# Altium PCB PCB_热插拔CSPS电源背板_ESP32.pcbdoc
Units mm, origin at the board's own origin, x right, y up, seen from the top; angles counter-clockwise.
Board outline 100.15 x 40.25 mm, 2 copper layers (Top Layer, Bottom Layer); 31 components, 27 nets, 191 pads, 313 vias.
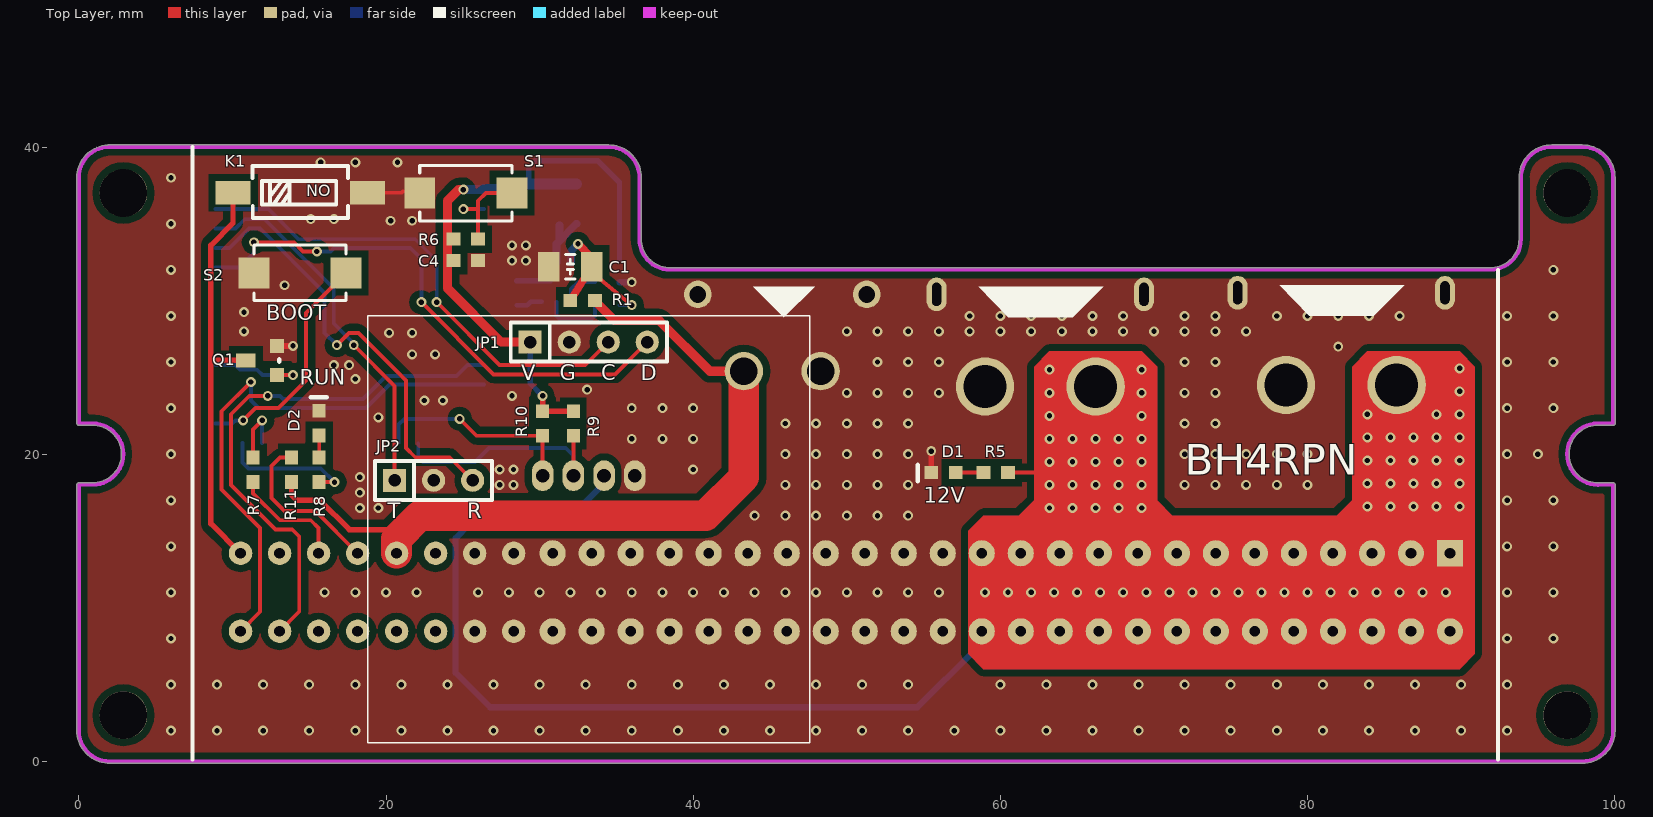
[diagram p0: Top Layer view]
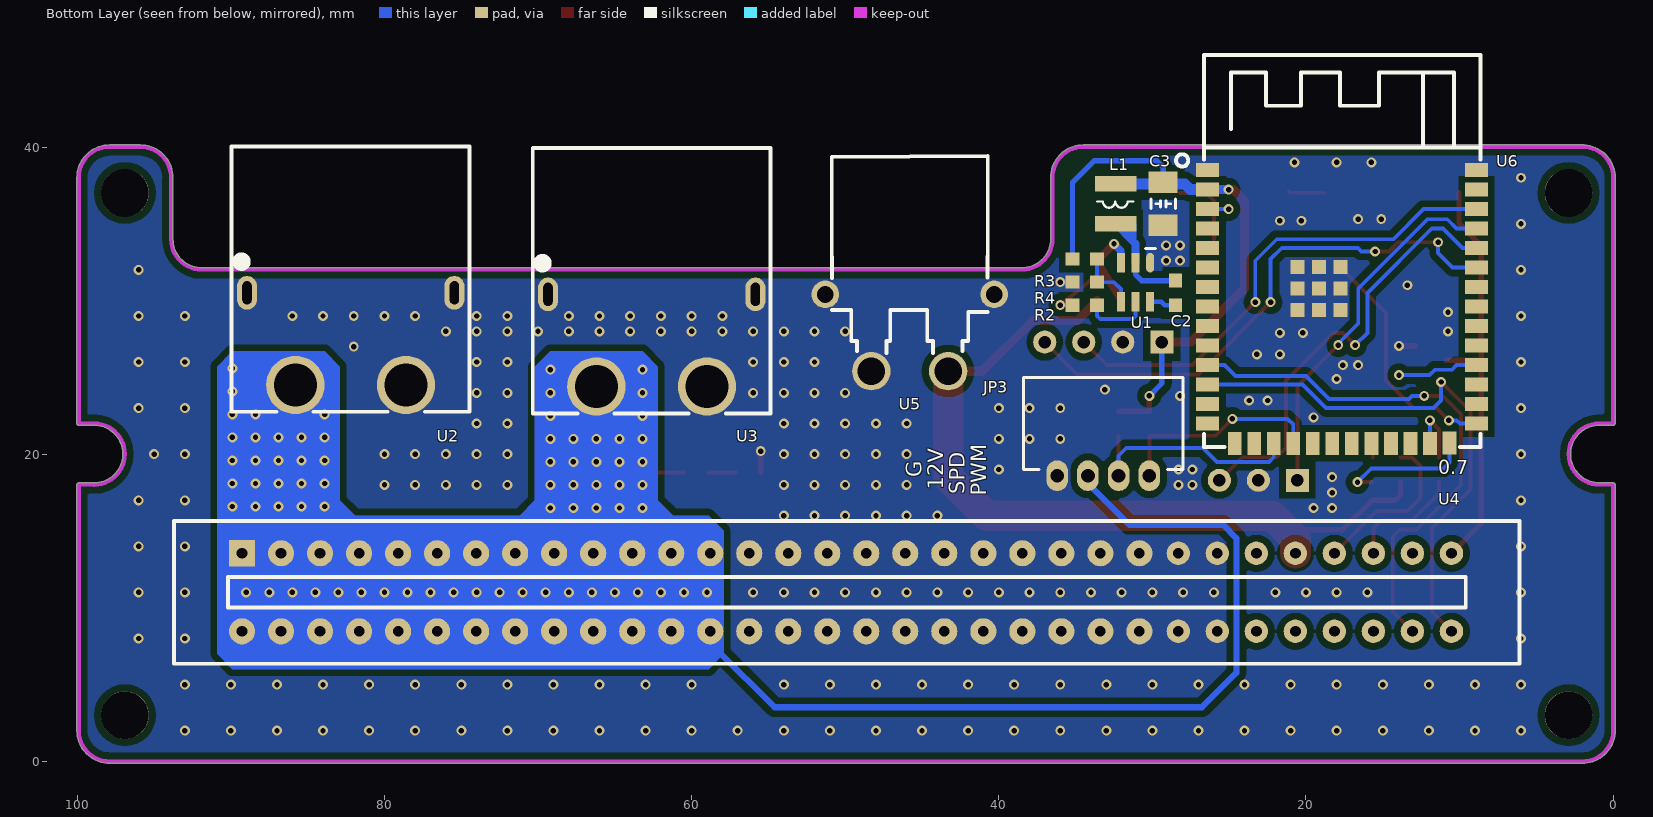
[diagram p1: Bottom Layer view, seen from below]
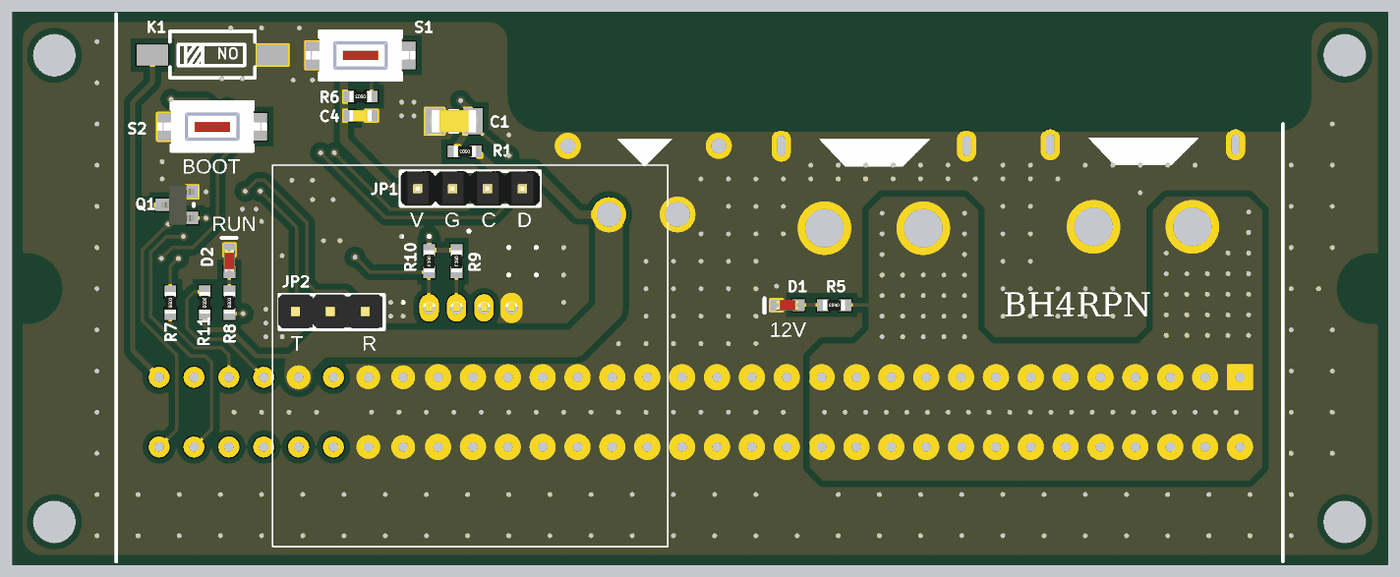
[diagram p2: 3D render of the assembled board from above, using the file's embedded part models]
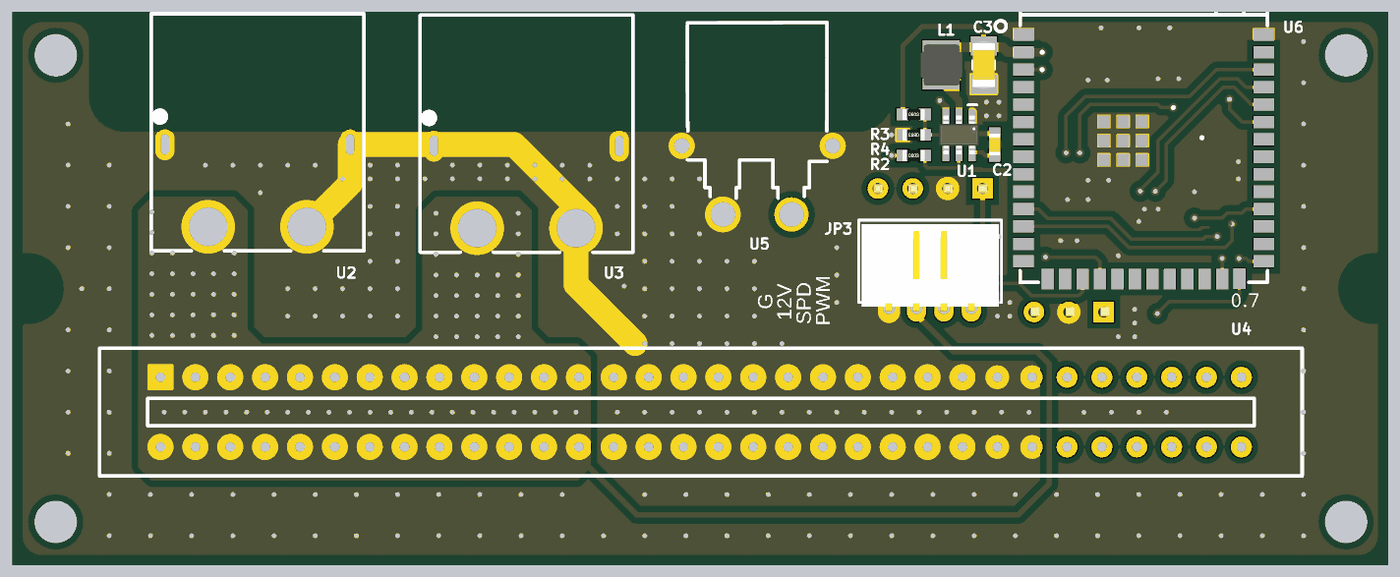
[diagram p3: 3D render of the assembled board from below, using the file's embedded part models]

## Layer stack, top to bottom
Top Solder: solder mask 0.0102, Solder Resist, Dk 3.5
Top Layer: signal copper 0.0356
Dielectric1: dielectric 0.32, FR-4, Dk 4.8
Bottom Layer: signal copper 0.0356
Bottom Solder: solder mask 0.0102, Solder Resist, Dk 3.5

## Board outline
-0.127,18.008 cw(c0,18.008) 0,18.135 0.9,18.135 ccw(c0.9,20.008) 2.773,20.008 ccw(c0.9,20.008) 0.9,21.881 cw(c0.9,22.008) 0.88,21.882 0,21.881 cw(c0,22.008) -0.127,22.008 cw(c0,22.009) -0.127,22.009 -0.127,38.007 -0.127,38.008 cw(c2,38.008) 1.868,40.131 cw(c1.9,40.008) 1.9,40.135 34.5,40.135 cw(c34.5,38.008) 36.627,38.008 36.627,34.008 ccw(c38.5,34.008) 38.5,32.135 91.9,32.135 ccw(c91.9,34.008) 93.772,34.008 93.772,38.008 cw(c95.9,38.008) 95.9,40.135 97.9,40.135 cw(c97.9,38.008) 100.027,38.011 cw(c99.9,38.008) 100.027,38.008 100.027,22.008 cw(c99.9,22.008) 99.85,21.891 cw(c99.8,22.008) 99.8,21.881 98.9,21.881 ccw(c98.9,20.008) 98.9,18.135 cw(c98.9,18.008) 98.921,18.134 99.9,18.135 cw(c99.9,18.008) 100.027,18.008 cw(c99.9,18.008) 100.027,18.007 cw(c99.9,18.006) 100.027,18.006 100.027,2.008 cw(c99.9,2.008) 100.027,2.003 cw(c97.9,2.008) 97.9,-0.119 cw(c97.9,0.008) 97.897,-0.119 1.9,-0.119 cw(c1.9,0.008) 1.868,-0.115 cw(c2,2.008) -0.127,2.008

## Design rules (kind name [scope] priority, off if disabled: settings)
Clearance Clearance_1 [InPolygon] p1: gap=0.45 ignorepadtopadclearanceinfootprint=FALSE except(0: Arc-Hole Track-Hole SMDPad-Hole THPad-Hole Via-Hole Fill-Hole Poly-Hole Region-Hole Text-Hole)
Clearance [All] p2: gap=0.254 ignorepadtopadclearanceinfootprint=FALSE except(0: Arc-Hole Track-Hole SMDPad-Hole THPad-Hole Via-Hole Fill-Hole Poly-Hole Region-Hole Text-Hole)
PolygonConnect PolygonConnect_1 [IsVia] p1: connectstyle=Direct reliefconductorwidth=0.254 reliefentries=4 polygonreliefangle="90 Angle" airgapwidth=0.254
PolygonConnect [All] p2: connectstyle=Direct reliefconductorwidth=0.254 reliefentries=4 polygonreliefangle="90 Angle" airgapwidth=0.254
RoomDefinition PCB_热插拔CSPS电源背板_ESP32 [InComponentClass('PCB_热插拔CSPS电源背板_ESP32')] p1: confinementstyle=ConfineIn formatcopy=TRUE lockcomponents=FALSE outline -56.35,-39.092 -5.55,-39.092 -5.55,-13.692 -56.35,-13.692
RoutingVias [All] p1: holewidth=0.711 width=1.27 viastyle="Through Hole" minholewidth=0.711 minwidth=1.27 maxholewidth=0.711 maxwidth=1.27
SolderMaskExpansion [All] p1: expansion=0.102 istentingtop=FALSE
Width [All] p1: maxlimit=5 minlimit=0.2 preferedwidth=0.254
30 further rules are at their usual default settings.

## Components (designator, comment, footprint, x,y, rotation, side; value= is the part's Value field where it differs from the comment)
C1 "25V10uF" 1206C 32,32.2 r180 top
C2 "100nF" 0603C 28.5,30.5 r270 bottom
C3 "10V47uF" 1206C 29.3,36.3 r270 bottom
C4 "100nF" 0603C 25.2,32.6 r0 top
D1 "LED_GR" LED-SMD-0603 56.3,18.8 r180 top
D2 "LED_GR" LED-SMD-0603 15.65,22.025 r90 top
JP1 "ssd1136" SIP4 33.2,27.3 r0 top
JP2 "UART" SIP3 23.1,18.3 r0 top
JP3 "FAN" PH2.0-4AW 33.2,22.2 r180 bottom
K1 "贴片拨码开关1P" ?#1 14.6,35.5 r270 top
L1 "SWPA3015S4R7MT" COKE_3X3A 32.4,36.3 r90 bottom
Q1 "DTC143ZCA" SOT23 11.9,26.1 r90 top
R1 "0R" 0603R 32.8,30 r180 top
R2 "100K" 0603R 34.4,29.7 r180 bottom
R3 "100K" 0603R 34.4,32.7 r180 bottom
R4 "31.6K" 0603R 34.4,31.2 r0 bottom
R5 "4.7K" 0603R 59.7,18.8 r180 top
R6 "10K" 0603R 25.2,34 r180 top
R7 "1K" 0603R 11.35,18.98 r90 top
R8 "1K" 0603R 15.65,18.98 r90 top
R9 "22K" 0603R 32.2,22 r270 top
R10 "22K" 0603R 30.2,22 r270 top
R11 "22K" 0603R 13.85,18.98 r270 top
S1 "REST" KEY-3.6X6 25.2,37 r0 top
S2 "BOOT" KEY-3.6X6 14.4,31.8 r180 top
U1 "MT1470" SOT23-6 31.1,31.2 r0 bottom
U2 "XT60PW-F" TH_2P-XT60PW-F 82.2,27.508 r0 bottom locked
U3 "XT60PW-F" TH_2P-XT60PW-F 62.6,27.408 r0 bottom locked
U4 "HP CSPS ATX 64P" ?#2 49.9,11.008 r0 bottom locked
U5 "XT30PW-F" CONN-TH_XT30PW-F 45.8,27.908 r180 bottom locked
U6 "ESP32-S3-WROOM-1(N16)" WIRELM-SMD_ESP32-S3-WROOM-1 17.65,29.605 r180 bottom locked

## Footprints (in the part's own frame and the unit in brackets; to place one, negate y for a bottom-side part, rotate by r counter-clockwise, add the part's x,y. Pads: shape width x height; smd on the part's side, far side on the other; paste and mask are expansions set on the pad)
0603C [mm]
  rect 0.9x0.85 smd: 1(0.8,0) 2(-0.8,0)
  body extent -0.93,-0.41 0.93,0.41, height 0.78
0603R [mm]
  rect 0.9x0.85 smd: 1(0.8,0) 2(-0.8,0)
  body extent -0.8,-0.4 0.8,0.4, height 0.49
1206C [mm]
  rect 1.4x1.9 smd: 1(-1.4,0) 2(1.4,0)
  silkscreen extent -0.3,-0.8 0.3,0.8, body extent -1.75,-0.81 1.75,0.81, height 1.61
COKE_3X3A [mm]
  rect 1x2.7 smd: 1(-1.3,0) 2(1.3,0)
  silkscreen extent -0.25,-1.16 0.15,1.21, body extent -1.5,-1.52 1.5,1.48, height 1.45
CONN-TH_XT30PW-F [mm]
  round 2.5 hole 1.8 paste+0 mask+0.051: 1(2.5,-2.5) 2(-2.5,-2.5)
  round 1.8 hole 1.1 paste+0 mask+0.051: 3(-5.5,2.5) 4(5.5,2.5)
  silkscreen extent -5.08,-1.31 5.08,11.49
KEY-3.6X6 [mm]
  rect 2x2 smd: 1(-3,0) 2(3,0)
  silkscreen extent -3,-1.81 3,1.79, body extent -4,-1.8 4,1.8, height 2.5
LED-SMD-0603 [mm]
  rect 0.9x0.85 smd: 1(-0.8,0) 2(0.8,0)
  silkscreen extent 1.67,-0.5 1.67,0.55, body extent -0.81,-0.4 0.81,0.4, height 0.6
PH2.0-4AW [mm]
  oval 1.4x2 hole 0.9: 1(-3,-3.6) 2(-1,-3.6) 3(1,-3.6) 4(3,-3.6)
  silkscreen extent -5.2,-3.2 5.2,2.8, body extent -5,-3.85 5,2.5, height 4.75
SIP3 [mm]
  rect 1.5x1.5 hole 0.813: 1(-2.54,0)
  round 1.5 hole 0.813: 2(0,0) 3(2.54,0)
  silkscreen extent -3.81,-1.27 3.81,1.27, body extent -3.91,-1.2 3.71,1.29, height 8.64
SIP4 [mm]
  rect 1.5x1.5 hole 0.813: 1(-3.81,0)
  round 1.5 hole 0.813: 2(-1.27,0) 3(1.27,0) 4(3.81,0)
  silkscreen extent -5.08,-1.27 5.09,1.27, body extent -5.08,-1.27 5.08,1.27, height 9.2
SOT23 [mil]
  rect 36x36 smd: 1(-37.5,-40) 2(37.5,-40)
  rect 36x50 smd: 3(0.5,40)
  silkscreen extent -2,-45 3,-45, body extent -57,-49 57,48, height 39
SOT23-6 [mil]
  oval 20x50 smd: 1(-37.5,-50)
  rect 20x50 smd: 2(0,-50) 3(37.5,-50) 4(37.5,50) 5(0,50) 6(-37.5,50)
  silkscreen extent -51,-87 -26,-87, body extent -57,-55 57,55, height 57
TH_2P-XT60PW-F [mm]
  oval 1.3x2.2 hole 0.6 slot 1.5 at 90 deg paste+0 mask+0.05: 1(6.75,-3) 2(-6.75,-3)
  round 3.8 hole 2.8 paste+0 mask+0.05: 3(3.6,3) 4(-3.6,3)
  silkscreen extent -7.75,-12.52 7.75,4.75
WIRELM-SMD_ESP32-S3-WROOM-1 [mm]
  rect 1.5x0.9 smd paste+0 mask+0.05: 1(-8.75,8.895) 2(-8.75,7.625) 3(-8.75,6.355) 4(-8.75,5.085) 5(-8.75,3.815) 6(-8.75,2.545) 7(-8.75,1.275) 8(-8.75,0.005) 9(-8.75,-1.265) 10(-8.75,-2.535) 11(-8.75,-3.805) 12(-8.75,-5.075) 13(-8.75,-6.345) 14(-8.75,-7.615) 27(8.75,-7.615) 28(8.75,-6.345) 29(8.75,-5.075) 30(8.75,-3.805) 31(8.75,-2.535) 32(8.75,-1.265) 33(8.75,0.005) 34(8.75,1.275) 35(8.75,2.545) 36(8.75,3.815) 37(8.75,5.085) 38(8.75,6.355) 39(8.75,7.625) 40(8.75,8.895)
  rect 0.9x1.5 smd paste+0 mask+0.05: 15(-6.985,-8.895) 16(-5.715,-8.895) 17(-4.445,-8.895) 18(-3.175,-8.895) 19(-1.905,-8.895) 20(-0.635,-8.895) 21(0.635,-8.895) 22(1.905,-8.895) 23(3.175,-8.895) 24(4.445,-8.895) 25(5.715,-8.895) 26(6.985,-8.865)
  rect 0.9x0.9 smd paste+0 mask+0.051: 41(-2.9,-0.225) 41(-2.9,1.175) 41(-2.9,2.575) 41(-1.5,-0.225) 41(-1.5,1.175) 41(-1.5,2.575) 41(-0.1,-0.225) 41(-0.1,1.175) 41(-0.1,2.575)
  silkscreen extent -10.82,-9.14 9.02,16.39
?#1 [mil]
  rect 60x90 smd paste+0 mask+4: 1(-60,-179.5) 2(-60,165)
  silkscreen extent -128,-129 5,115
?#2 [mil]
  round 66.93 hole 27.56 paste+0 mask+4: 1(1550,100) 2(1450,100) 3(1350,100) 4(1250,100) 5(1150,100) 6(1050,100) 7(950,100) 8(850,100) 9(750,100) 10(650,100) 11(550,100) 12(450,100) 13(350,100) 14(250,100) 15(150,100) 16(50,100) 17(-50,100) 18(-150,100) 19(-250,100) 20(-350,100) 21(-450,100) 22(-550,100) 23(-650,100) 24(-750,100) 41(-750,-100) 42(-650,-100) 43(-550,-100) 44(-450,-100) 45(-350,-100) 46(-250,-100) 47(-150,-100) 48(-50,-100) 49(50,-100) 50(150,-100) 51(250,-100) 52(350,-100) 53(450,-100) 54(550,-100) 55(650,-100) 56(750,-100) 57(850,-100) 58(950,-100) 59(1050,-100) 60(1150,-100) 61(1250,-100) 62(1350,-100) 63(1450,-100)
  round 60 hole 27.56 paste+0 mask+4: 25(-850,100) 26(-950,100) 27(-1050,100) 28(-1150,100) 29(-1250,100) 30(-1350,100) 31(-1450,100) 32(-1550,100) 33(-1550,-100) 34(-1450,-100) 35(-1350,-100) 36(-1250,-100) 37(-1150,-100) 38(-1050,-100) 39(-950,-100) 40(-850,-100)
  rect 66.93x66.93 hole 27.56 paste+0 mask+4: 64(1550,-100)
  silkscreen extent -1724,-183 1724,183

## Part data
C1 C2 C3 C4: library part Cap, "Capacitor"
D1 D2: library part LED
JP1 JP3: library part HEADER4
JP2: library part "HEADER 3"
L1: library part INDUCTOR
Q1: library part NPN, "NPN Transistor"
R1 R2 R3 R4 R5 R6 R7 R8 R9 R10 R11: library part Res2, "Resistor"
S1 S2: library part SW-PB

## Free pads (board coordinates)
  round 3.1 hole 3.1 unplated paste+0 mask+0.102: ""(2.9,3.008) ""(2.9,37.008) ""(96.9,3.008) ""(96.9,37.008)

## Via types
v1: diameter 0.65, hole 0.35, Top Layer to Bottom Layer, tented both sides, 313 vias

## Nets (pads, with @x,y where several pads share a name; then routed paths per layer and width w, separated by ;. In a path a pad name is that pad's centre, name@x,y a point inside that pad or via, vN(x,y) a via of type N, cw(c..) or ccw(c..) an arc to the next point about the centre after c; other vN are vias at no path point)
+12V: JP3.2 R5.2 U2.3 U3.3 U4.1 U4.2 U4.3 U4.4 U4.5 U4.6 U4.7 U4.8 U4.9 U4.10 U4.11 U4.12 U4.13 U4.52 U4.53 U4.54 U4.55 U4.56 U4.57 U4.58 U4.59 U4.60 U4.61 U4.62 U4.63 U4.64 | length 58.8
  Top Layer w0.25: R5.2 62.6,18.8
  Bottom Layer w0.4: JP3.2 34.2,18.1 31.5,15.4 25.4,15.4 24.525,14.525 24.525,5.775 26.775,3.525 54.6,3.525 58.35,7.275
  other v1: 59,11 60.5,11 62,11 63.5,11 65,11 66.5,11 68,11 69.5,11 71,11 72.5,11 74,11 75.5,11 77,11 78.5,11 80,11 81.5,11 83,11 84.5,11 86,11 87.5,11 89,11 63.2,16.5 64.7,16.5 66.2,16.5 67.7,16.5 69.2,16.5 83.9,16.592 85.4,16.592 86.9,16.592 88.4,16.592 89.9,16.592 63.2,18 64.7,18 66.2,18 67.7,18 69.2,18 83.9,18.092 85.4,18.092 86.9,18.092 88.4,18.092 89.9,18.092 63.2,19.5 64.7,19.5 66.2,19.5 67.7,19.5 69.2,19.5 83.9,19.592 85.4,19.592 86.9,19.592 88.4,19.592 89.9,19.592 63.2,21 64.7,21 66.2,21 67.7,21 69.2,21 83.9,21.092 85.4,21.092 86.9,21.092 88.4,21.092 89.9,21.092 63.2,22.5 69.2,22.5 83.9,22.592 88.4,22.6 89.9,22.592 63.2,24 69.2,24 89.9,24.092 63.2,25.5 69.2,25.5 89.9,25.592
+12VSB: R1.2 R11.1 U4.37 U5.1 | length 52.3
  Top Layer w0.35: R11.1 13.85,17.35 14.2,17 15.7,17 17.61,15.09 20.69,15.09
  Top Layer w0.6: R1.2 34.9,28.7 37.8,28.7 41.092,25.408 U5.1
  Top Layer w2: U4.37 20.69,14.49 22.2,16 40.8,16 43.3,18.5 U5.1
GND: C1.2 C3.2 C4.1 D1.2 D2.2 JP1.2 JP2.2 JP3.1 K1.2 Q1.2 R4.1 S1.1 S2.2 U1.1 U2.1 U2.2 U2.4 U3.1 U3.2 U3.4 U4.14 U4.15 U4.16 U4.17 U4.18 U4.19 U4.20 U4.21 U4.22 U4.23 U4.24 U4.25 U4.26 U4.39 U4.40 U4.41 U4.42 U4.43 U4.44 U4.45 U4.46 U4.47 U4.48 U4.49 U4.50 U4.51 U5.2 U5.3 U5.4 U6.1 U6.40 U6.41 | length 5.6
  Top Layer w0.254: K1.2 21.024,37.024 21.1,37.1
  Top Layer w0.35: D1.2 v1(55.5,20.2)
  Top Layer w0.4: Q1.2 v1(13.947,27.053)
  Bottom Layer w0.4: R4.1 v1(36,31.2)
  other v1: 6,2 9,2 12,2 15,2 18,2 21,2 24,2 27,2 30,2 33,2 36,2 39,2 42,2 45,2 48,2 51,2 54,2 57,2 60,2 63,2 66,2 69,2 72,2 75,2 78,2 81,2 84,2 87,2 90,2 93,2 6,5 9,5 12,5 15,5 18,5 21,5 24,5 27,5 30,5 33,5 36,5 39,5 42,5 45,5 48,5 51,5 54,5 60,5 63,5 66,5 69,5 72,5 75,5 78,5 81,5 84,5 87,5 90,5 93,5 6,8 93,8 96,8 6,11 16,11 18,11 20,11 22,11 26,11 28,11 30,11 32,11 34,11 36,11 38,11 40,11 42,11 44,11 46,11 48,11 50,11 52,11 54,11 56,11 93,11 96,11 6,14 93,14 96,14 44,16 46,16 48,16 50,16 52,16 54,16 18.3,16.5 19.5,16.5 6,17 93,17 96,17 18.3,17.5 27.4,18 28.3,18 46,18 48,18 50,18 52,18 54,18 72,18 74,18 76,18 78,18 80,18 18.3,18.5 27.4,19 28.3,19 40,19 6,20 46,20 48,20 50,20 52,20 54,20 72,20 74,20 76,20 78,20 80,20 93,20 95,20 36,21 38,21 40,21 46,22 48,22 50,22 52,22 54,22 72,22 74,22 19.5,22.4 6,23 36,23 38,23 40,23 93,23 96,23 22.5,23.5 23.7,23.5 28.2,23.8 50,24 52,24 54,24 56,24 72,24 74,24 33.1,24.2 18,24.9 16.6,25.8 17.6,25.8 6,26 52,26 54,26 56,26 72,26 74,26 93,26 96,26 21.7,26.5 23.2,26.5 82,27 20.2,27.9 21.7,27.9 10.75,28 50,28 52,28 54,28 56,28 58,28 60,28 62,28 64,28 66,28 68,28 70,28 72,28 74,28 76,28 6,29 58,29 60,29 62,29 64,29 66,29 68,29 72,29 74,29 78,29 80,29 82,29 84,29 86,29 93,29 96,29 10.75,29.25 13.4,31 6,32 96,32 28.2,32.6 29.1,32.6 28.2,33.6 29.1,33.6 6,35 20.3,35.2 21.7,35.2 15.1,35.3 16.6,35.3 6,38 15.75,39 18,39 20.75,39
LED: R8.2 U6.26 | length 8.8
  Top Layer w0.25: R8.2 v1(16.65,18.18)
  Bottom Layer w0.25: U6.26 10.665,19.465 11.05,19.08 15.75,19.08 v1(16.65,18.18)
NetC1_1: C1.1 R1.1 R2.2 U1.3 | length 10.3
  Top Layer w0.25: C1.1@33.22,31.981 33.247,31.959 v1(36,29.7)
  Top Layer w0.5: R1.1 33.247,31.959 C1.1 33.4,32.8 v1(32.5,33.7)
  Bottom Layer w0.25: R2.2 v1(36,29.7)
  Bottom Layer w0.5: U1.3 32.052,33.252 v1(32.5,33.7)
NetC2_1: C2.1 U1.6 | length 1.7
  Bottom Layer w0.3: C2.1 29.2,29.7 29.43,29.93 U1.6
NetC2_2: C2.2 L1.1 U1.2 | length 7.6
  Bottom Layer w0.35: C2.2 30.7,31.3 31.1,31.7 U1.2
  Bottom Layer w0.5: U1.2 31.1,33.7 31.3,33.9 ; L1.1@31.3,34.9 31.3,33.9 ; L1.1 31.3,33.9
NetD1_1: D1.1 R5.1 | length 1.8
  Top Layer w0.25: D1.1 R5.1
NetD2_1: D2.1 R8.1 | length 1.4
  Top Layer w0.25: R8.1 D2.1
NetK1_1: K1.1 Q1.3 U4.33 | length 27.2
  Top Layer w0.35: K1.1 10.041,35.041 8.6,33.6 8.6,26.1 ; U4.33 8.6,15.478 8.6,26.1 ; Q1.3 8.613,26.113 8.6,26.1
NetK1_2: R11.2 U4.36 | length 10.7
  Top Layer w0.25: R11.2 13.1,19.78 12.55,19.23 12.55,17.15 13.4,16.3 15.398,16.3 U4.36
NetR2_1: R2.1 U1.5 | length 4.3
  Bottom Layer w0.25: U1.5 31.1,29 31.3,28.8 33.4,28.8 33.6,29 R2.1
NetR3_1: R3.1 R4.2 U1.4 | length 4.1
  Bottom Layer w0.25: U1.4 32.052,30.752 32.5,31.2 R4.2 R3.1
NetR6_2: R6.2 S1.2 U6.3 | length 7.2
  Top Layer w0.25: v1(25.04,35.96) 25.96,35.96 26,36 ; R6.2 26,36 ; S1.2 26.5,37 26,36.5 26,36
  Bottom Layer w0.25: v1(25.04,35.96) U6.3
NetR7_2: R7.2 U4.35 | length 7.6
  Top Layer w0.25: R7.2 11.35,17.45 13.1,15.7 15.1,15.7 15.61,15.19 U4.35
NetS2_1: S2.1 U6.27 | length 15.1
  Top Layer w0.25: v1(10.7,22.2) 11.5,23 13,23 14.8,24.8 14.8,29.2 S2.1
  Bottom Layer w0.25: U6.27 9.99,21.99 10.2,22.2 v1(10.7,22.2)
PG: R7.1 U6.25 | length 4.2
  Top Layer w0.25: R7.1 11.35,21.615 v1(11.935,22.2)
  Bottom Layer w0.25: U6.25 v1(11.935,22.2)
PWM: JP3.4 R10.1 U6.18 | length 13.8
  Top Layer w0.25: v1(24.8,22.3) 25.9,21.2 R10.1 JP3.4
  Bottom Layer w0.25: U6.18 20.825,21.925 21.2,22.3 v1(24.8,22.3)
RX0: JP2.3 U6.36 | length 28.8
  Top Layer w0.25: v1(16.8,27.1) 17.6,27.9 18.2,27.9 21.3,24.8 21.3,20.4 21.9,19.8 24.14,19.8 JP2.3
  Bottom Layer w0.25: U6.36 9.82,33.42 11.09,34.69 11.81,34.69 16,30.5 16,27.9 v1(16.8,27.1)
SCL: U4.32 U6.12 | length 35.8
  Top Layer w0.25: U4.32 11.8,9.738 11.8,15.2 9.3,17.7 9.3,22.8 v1(11.2,24.7)
  Bottom Layer w0.25: v1(11.2,24.7) 11.2,23.5 11.7,23 18.7,23 20.23,24.53 U6.12
SCL_OLED: JP1.3 U6.38 | length 32
  Top Layer w0.25: v1(23.3,29.9) 27.4,25.8 32.97,25.8 JP1.3
  Bottom Layer w0.25: U6.38 12.34,35.96 14.3,34 21.9,34 23.3,32.6 v1(23.3,29.9)
SDA: U4.31 U6.11 | length 35.1
  Top Layer w0.25: v1(12.3,23.8) 11.1,23.8 9.9,22.6 9.9,18 12.8,15.1 13.9,15.1 14.35,14.65 14.35,9.748 U4.31
  Bottom Layer w0.25: v1(12.3,23.8) 13.1,23.8 13.3,23.6 18.5,23.6 20,25.1 24.6,25.1 25.3,25.8 U6.11
SDA_OLED: JP1.4 U6.35 | length 35.5
  Top Layer w0.25: v1(11.4,33.8) 14,33.8 14.6,33.2 v1(15.5,33.2) ; v1(22.3,29.9) 27,25.2 34.91,25.2 JP1.4
  Bottom Layer w0.25: U6.35 10.45,32.15 11.4,33.1 v1(11.4,33.8) ; v1(15.5,33.2) 16.4,33.2 16.62,33.42 21.58,33.42 22.3,32.7 v1(22.3,29.9)
SPD: JP3.3 R9.1 U6.17 | length 15.6
  Top Layer w0.25: JP3.3 R9.1
  Bottom Layer w0.25: U6.17 22.095,19.805 22.4,19.5 25.8,19.5 26.7,20.4 31.7,20.4 32.2,19.9 JP3.3
SW: Q1.1 U6.30 | length 6.3
  Top Layer w0.25: Q1.1 v1(13.947,25.148)
  Bottom Layer w0.25: U6.30 10.2,25.8 10.5,25.5 11.6,25.5 11.952,25.148 v1(13.947,25.148)
TX0: JP2.1 U6.37 | length 24.2
  Top Layer w0.25: v1@17.9,26.9 v1(17.9,27.1) 20.56,24.44 JP2.1
  Bottom Layer w0.25: U6.37 10.19,34.69 10.8,35.3 12.1,35.3 16.6,30.8 16.6,28.5 17.9,27.2 v1(17.9,27.1)
VCC_3V3: C3.1 C4.2 JP1.1 L1.2 R3.2 R6.1 R9.2 R10.2 U6.2 | length 40.9
  Top Layer w0.35: v1(30.2,23.8) R10.2 R9.2
  Top Layer w0.6: v1(25.04,37.23) 24.73,37.23 24,36.5 24,30.8 27.5,27.3 JP1.1
  Bottom Layer w0.35: C3.1 29.3,38.7 29.7,39.1 33.8,39.1 35.2,37.7 R3.2 ; JP1.1 29.39,24.61 v1(30.2,23.8)
  Bottom Layer w0.6: v1(25.04,37.23) U6.2
  Bottom Layer w0.7: U6.2 27.53,37.23 27.9,37.6 L1.2
pads on no net: U4.27 U4.28 U4.29 U4.30 U4.34 U4.38 U6.4 U6.5 U6.6 U6.7 U6.8 U6.9 U6.10 U6.13 U6.14 U6.15 U6.16 U6.19 U6.20 U6.21 U6.22 U6.23 U6.24 U6.28 U6.29 U6.31 U6.32 U6.33 U6.34 U6.39

## Polygon pours and split planes (outlines as drawn)
GND on Bottom Layer "TOP1-No Net" (solid, remove dead copper, pour order 10): 0,0 100,0 100,40 0,40 0,0
GND on Top Layer "TOP1-No Net" (solid, remove dead copper, pour order 8): 0,0 100,0 100,40 0,40 0,0

## Keep-outs
Keep-Out Layer:
  lines w0.254: 0,22.008 1,22.01 ; 0,22.009 0,38.007 ; 0,38.008 cw(c2,38.008) 2,40.008 ; 0.9,22.008 cw(c0.9,20.008) 0.9,18.008 0,18.008 0,2.008 ccw(c2,2.008) 2,0.008 ; 1.9,0.008 97.9,0.008 ccw(c97.9,2.008) 99.9,2.008 99.9,18.006 ; 1.9,40.008 34.5,40.008 cw(c34.5,38.008) 36.5,38.008 36.5,34.008 ccw(c38.5,34.008) 38.5,32.008 91.9,32.008 ccw(c91.9,34.008) 93.9,34.008 93.9,38.008 cw(c95.9,38.008) 95.9,40.008 97.9,40.008 cw(c97.9,38.008) 99.9,38.008 99.9,22.008 ; 98.9,18.006 99.9,18.008 ; 98.9,18.008 cw(c98.9,20.008) 98.9,22.008 99.8,22.008

## Other copper
Top Layer:
  region net +12V: 61.2,16.008 62.2,17.008 62.2,25.708 63.192,26.7 66.2,26.7 69.208,26.7 70.2,25.708 70.2,17.008 71.2,16.008 81.9,16.008 82.9,17.008 82.9,25.7 83.9,26.7 87,26.7 89.9,26.7 90.9,25.7 90.9,7.008 89.9,6.008 58.9,6.008 57.9,7.008 57.9,15.008 58.9,16.008 60.6,16.008
Bottom Layer:
  pour cut-out: 30.7,37 33.9,37 33.9,35.8 30.7,35.8
  region net +12V: 61.2,16.008 62.2,17.008 62.2,25.708 63.192,26.7 66.2,26.7 69.208,26.7 70.2,25.708 70.2,17.008 71.2,16.008 81.9,16.008 82.9,17.008 82.9,25.7 83.9,26.7 87,26.7 89.9,26.7 90.9,25.7 90.9,7.008 89.9,6.008 58.9,6.008 57.9,7.008 57.9,15.008 58.9,16.008 60.6,16.008

## Silkscreen, mask and mechanical layers (free items; w line width, h text height)
Top Overlay:
  region: 43.9,30.908 47.9,30.908 45.9,28.908
  region: 58.6,30.908 66.7,30.908 64.7,28.908 60.5,28.908
  region: 78.2,31.008 86.3,31.008 84.3,29.008 80.1,29.008
  lines w0.1: 18.8,1.2 47.6,1.2 47.6,29 18.8,29 18.8,1.2
  lines w0.254: 7.4,0.108 7.4,40.008 ; 92.4,0.108 92.4,32
  text "BOOT" at 12.2,28.4 h1.7
  text "V" at 28.8,24.5 h1.7
  text "G" at 31.3,24.5 h1.7
  text "C" at 34,24.5 h1.7
  text "D" at 36.6,24.5 h1.7
  text "RUN" at 14.375,24.2 h1.7
  text "BH4RPN" at 72,18 h3.4
  text "12V" at 55,16.5 h1.7
  text "T" at 20.1,15.5 h1.7
  text "R" at 25.3,15.5 h1.7
Bottom Overlay:
  text "G" at 44.7,18.5 h1.7 r270
  text "12V" at 43.3,17.7 h1.7 r270
  text "SPD" at 41.9,17.4 h1.7 r270
  text "PWM" at 40.5,17.3 h1.7 r270
Bottom Solder:
  lines w1.8: 54.7,16 59,20.3 59,24.408 ; 58.3,24.1 58.3,25.3 63.508,30.508 75.45,30.508 75.45,27.658 78.6,24.508

## Text inside footprints (layer, text, board x,y; h text height)
K1: Top Overlay "ON" at 16.416,37.535 h0.76 r180
U4: Bottom Overlay "0.7" at 11.4,18.7 h0.9